# Altium PCB som_fpga.PcbDoc (part 2 of 2)
Units mil, origin at the board's own origin, x right, y up, seen from the top; angles counter-clockwise.
Board outline 2362.2 x 1968.5 mil, 4 copper layers (F.Cu, In1.Cu, In2.Cu, B.Cu); 88 components, 289 nets, 794 pads, 250 vias.
Unrouted connection lines stored in the file: 96.
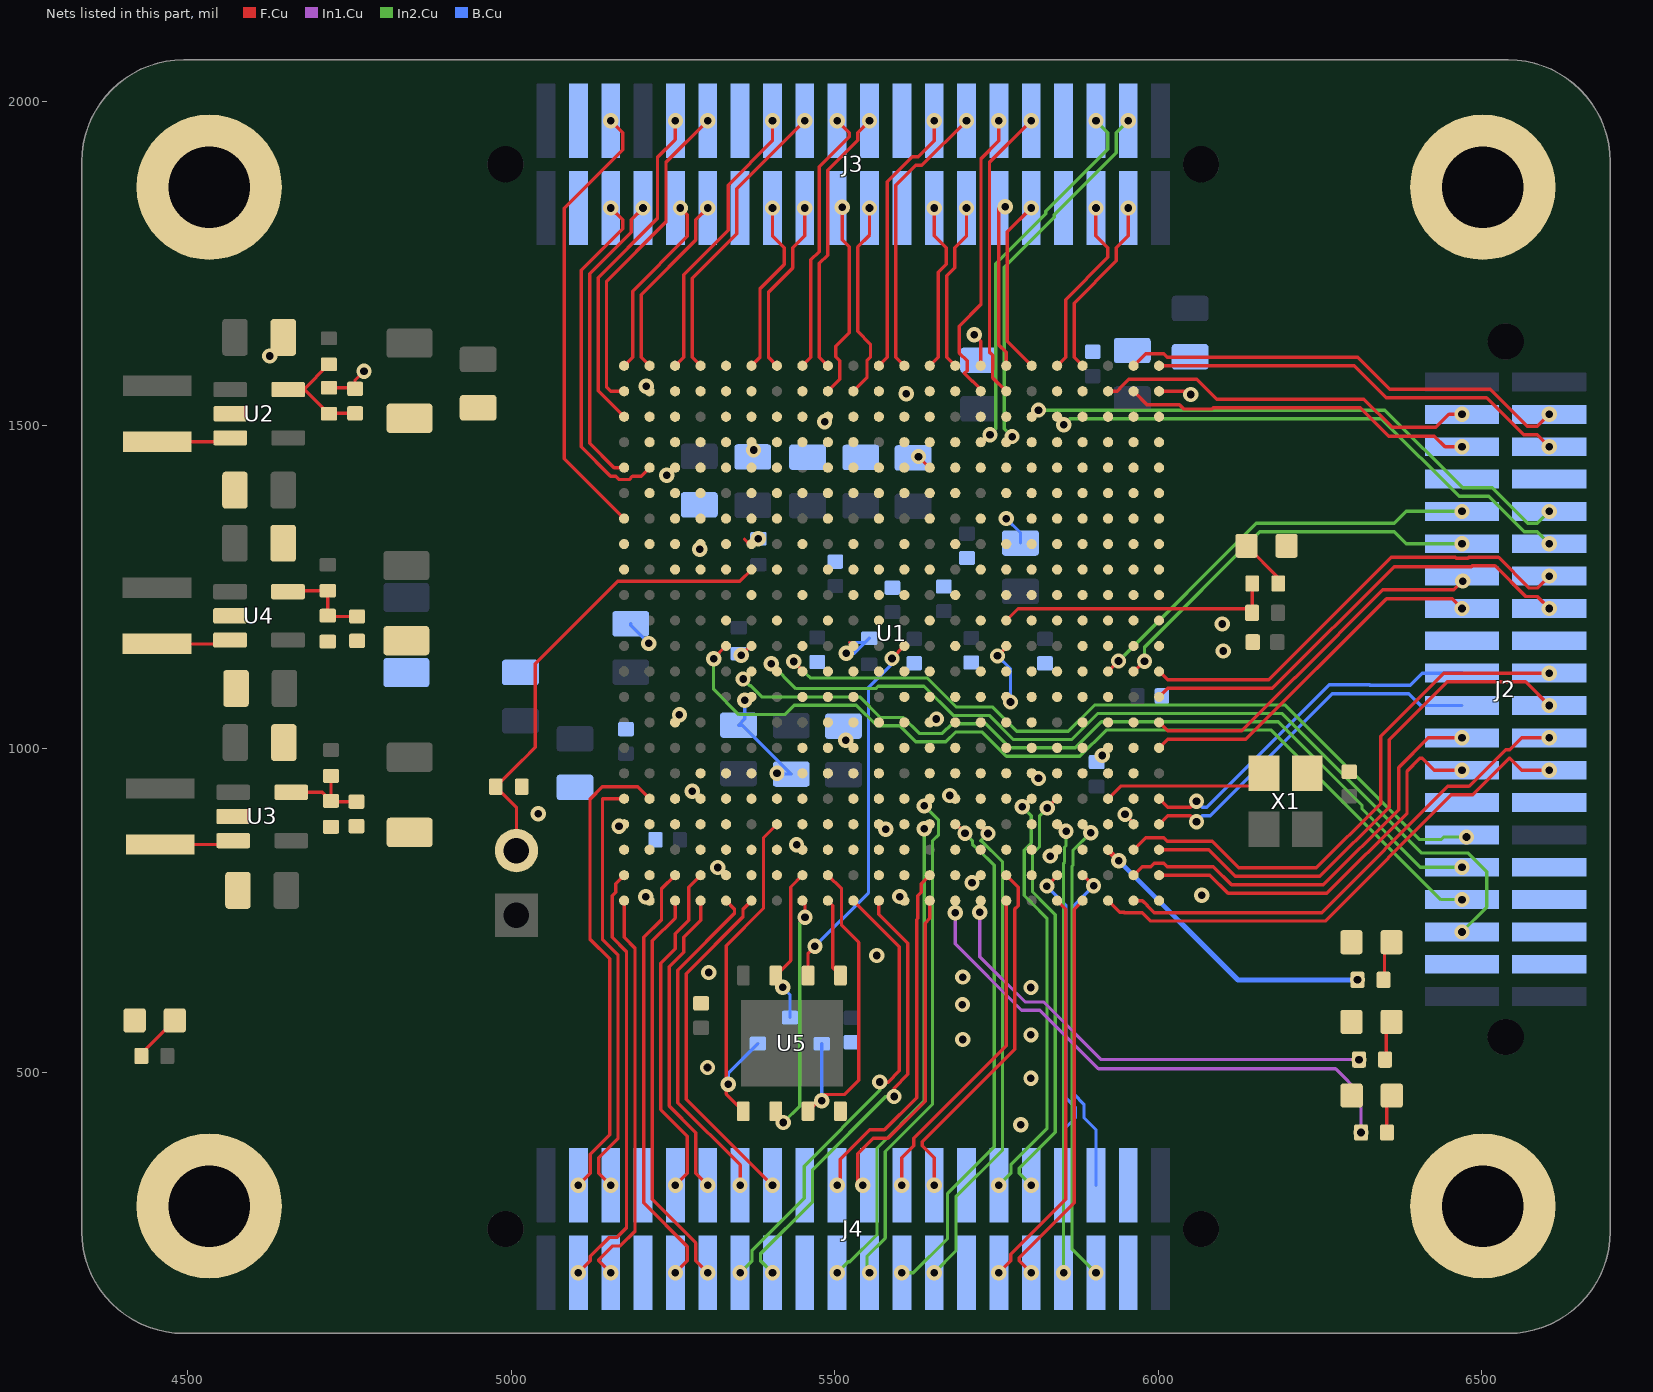
[diagram p4: the nets of this part, all layers, seen from the top]

## Via types
v1: diameter 23.62, hole 11.81, F.Cu to B.Cu, tented both sides, 250 vias

## Nets (pads, with @x,y where several pads share a name; then routed paths per layer and width w, separated by ;. In a path a pad name is that pad's centre, name@x,y a point inside that pad or via, vN(x,y) a via of type N, cw(c..) or ccw(c..) an arc to the next point about the centre after c; other vN are vias at no path point) (continued)
CONN1.1_P: J3.5 U1.AB7 | length 698.7
  F.Cu w5.25: v1(5153.64,1970.67) 5172.08,1952.23 5172.08,1925.85 5081.63,1835.4 5081.63,1448.29 U1.AB7@5174.41,1355.51
CONN1.2_N: J3.8 U1.AB5 | length 466.9
  F.Cu w5.25: U1.AB5@5174.41,1434.25 5158.74,1434.25 5120.98,1472.01 5120.98,1733.75 5185.2,1797.97 5185.2,1817.19 v1(5203.64,1835.63)
CONN1.2_P: J3.6 U1.AA5 | length 537.8
  F.Cu w5.25: v1(5153.64,1835.63) 5172.08,1817.19 5172.08,1803.41 5107.86,1739.18 5107.86,1466.57 5153.3,1421.13 5161.55,1421.13 5166.8,1415.88 5182.02,1415.88 5187.27,1421.13 5200.66,1421.13 U1.AA5@5213.78,1434.25
CONN1.3_N: J3.11 U1.AB2 | length 506.6
  F.Cu w5.25: U1.AB2@5174.41,1552.36 5153.6,1552.36 5147.21,1558.75 5147.21,1722.57 5239.08,1814.44 5239.08,1906.1 v1(5303.64,1970.67)
CONN1.3_P: J3.9 U1.AB3 | length 523.9
  F.Cu w5.25: U1.AB3@5174.41,1512.99 5134.08,1553.32 5134.08,1728.01 5225.95,1819.88 5225.95,1913.75 5253.64,1941.44 v1(5253.64,1970.67)
CONN1.4_N: J3.10 U1.AB1 | length 288.8
  F.Cu w5.25: U1.AB1@5174.41,1591.73 5187.53,1604.86 5187.53,1707.05 5272.08,1791.6 5272.08,1824.92 v1(5261.37,1835.63)
CONN1.4_P: J3.12 U1.AA1 | length 292
  F.Cu w5.25: U1.AA1@5213.78,1591.73 5200.66,1604.86 5200.66,1701.61 5285.2,1786.16 5285.2,1817.19 v1(5303.64,1835.63)
CONN1.5_N: J3.15 U1.Y1 | length 441.3
  F.Cu w5.25: U1.Y1@5253.15,1591.73 5266.27,1604.86 5266.27,1732.25 5335.17,1801.14 5335.17,1870.76 5403.64,1939.23 v1(5403.64,1970.67)
CONN1.5_P: J3.17 U1.W1 | length 456.5
  F.Cu w5.25: U1.W1@5292.52,1591.73 5279.4,1604.86 5279.4,1726.81 5348.29,1795.71 5348.29,1865.32 v1(5453.64,1970.67)
CONN1.6_N: J3.16 U1.U1 | length 272.6
  F.Cu w5.25: U1.U1@5371.26,1591.73 5384.38,1604.86 5384.38,1710.59 5422.08,1748.29 5422.08,1774.28 5403.64,1792.72 v1(5403.64,1835.63)
CONN1.6_P: J3.18 U1.T1 | length 272.6
  F.Cu w5.25: U1.T1@5410.63,1591.73 5397.51,1604.86 5397.51,1705.16 5435.2,1742.85 5435.2,1774.28 5453.64,1792.72 v1(5453.64,1835.63)
CONN1.7_N: J3.21 U1.P1 | length 416.6
  F.Cu w5.25: U1.P1@5489.37,1591.73 5476.25,1604.86 5476.25,1750.04 5488.85,1762.64 5488.85,1820.72 5489.07,1820.95 5489.07,1850.31 5488.85,1850.54 5488.85,1894.13 5535.2,1940.49 5535.2,1952.23 v1(5553.64,1970.67)
CONN1.7_P: J3.19 U1.R1 | length 416.6
  F.Cu w5.25: U1.R1@5450,1591.73 5463.12,1604.86 5463.12,1755.47 5475.72,1768.07 5475.72,1826.16 5475.95,1826.39 5475.95,1844.87 5475.72,1845.1 5475.72,1899.57 5522.08,1945.93 5522.08,1952.23 v1(5503.64,1970.67)
CONN1.8_N: J3.22 U1.N2 | length 310.1
  F.Cu w5.25: U1.N2@5528.74,1552.36 5549.74,1573.36 5549.74,1599.34 5555.12,1604.72 5555.12,1625.2 5535.2,1645.11 5535.2,1775.36 5553.64,1793.8 v1(5553.64,1835.63)
CONN1.8_P: J3.20 U1.P2 | length 307.8
  F.Cu w5.25: U1.P2@5489.37,1552.36 5507.74,1570.74 5507.74,1599.34 5501.18,1605.9 5501.18,1622.05 5522.08,1642.95 5522.08,1775.95 5511.37,1786.67 v1(5511.37,1836.77)
CONN1.9_N: J3.27 U1.L1 | length 435.2
  F.Cu w5.25: U1.L1@5607.48,1591.73 5594.36,1604.86 5594.36,1870.9 5625.16,1901.71 5634.68,1901.71 v1(5703.64,1970.67)
CONN1.9_P: J3.25 U1.M1 | length 419.9
  F.Cu w5.25: U1.M1@5568.11,1591.73 5581.23,1604.86 5581.23,1876.34 5619.72,1914.83 5629.24,1914.83 5653.64,1939.23 v1(5653.64,1970.67)
CONN1.10_N: J3.28 U1.J1 | length 262
  F.Cu w5.25: U1.J1@5686.22,1591.73 5673.1,1604.86 5673.1,1731.14 5685.2,1743.25 5685.2,1774.28 5703.64,1792.72 v1(5703.64,1835.63)
CONN1.10_P: J3.26 U1.K1 | length 262
  F.Cu w5.25: U1.K1@5646.85,1591.73 5659.97,1604.86 5659.97,1736.58 5672.08,1748.68 5672.08,1774.28 5653.64,1792.72 v1(5653.64,1835.63)
CONN1.11_N: J3.31 U1.G2 | length 456
  F.Cu w5.25: U1.G2@5764.96,1552.36 5743.7,1573.62 5743.7,1586.22 5743.96,1586.48 5743.96,1607.82 5739.11,1612.67 5739.11,1906.14 v1(5803.64,1970.67)
CONN1.11_P: J3.29 U1.H2 | length 461.3
  F.Cu w5.25: U1.H2@5725.59,1552.36 5725.59,1555.51 5713.39,1567.72 5712.6,1567.72 5700.39,1579.92 5704.59,1584.12 5704.59,1599.34 5692.52,1611.42 5692.52,1653.15 5725.98,1686.61 5725.98,1911.57 5753.64,1939.23 v1(5753.64,1970.67)
CONN1.12_N: J3.32 U1.F1 | length 274.7
  F.Cu w5.25: v1(5803.64,1835.63) 5766.77,1798.75 5766.77,1629.3 U1.F1@5804.33,1591.73
CONN1.12_P: J3.30 U1.G1 | length 248.6
  F.Cu w5.25: v1@5753.64,1835.63 5753.64,1623.86 5764.96,1612.54 U1.G1@5764.96,1591.73
  other v1: 5763.39,1837.4
CONN1.13_N: J3.37 U1.G4 | length 585.3
  F.Cu w5.25: U1.G4@5764.96,1473.62 5765.35,1473.62 v1(5774.02,1482.28)
  In2.Cu w5.25: v1(5774.02,1482.28) 5762.11,1494.18 5762.11,1743.99 5839.07,1820.95 5839.07,1825.07 5935.2,1921.2 5935.2,1952.23 v1(5953.64,1970.67)
CONN1.13_P: J3.35 U1.H4 | length 587.7
  F.Cu w5.25: U1.H4@5725.59,1473.62 5728.43,1473.62 v1(5739.94,1485.14)
  In2.Cu w5.25: v1(5739.94,1485.14) 5748.99,1494.18 5748.99,1749.43 5825.95,1826.39 5825.95,1830.51 5922.08,1926.64 5922.08,1952.23 v1(5903.64,1970.67)
CONN1.14_N: J3.38 U1.D1 | length 284
  F.Cu w5.25: U1.D1@5883.07,1591.73 5869.95,1604.86 5869.95,1688.62 5935.2,1753.88 5935.2,1774.28 5953.64,1792.72 v1(5953.64,1835.63)
CONN1.14_P: J3.36 U1.E1 | length 284
  F.Cu w5.25: U1.E1@5843.7,1591.73 5856.82,1604.86 5856.82,1694.06 5922.08,1759.31 5922.08,1774.28 5903.64,1792.72 v1(5903.64,1835.63)
CONN2.1_N: J4.5 U1.D19 | length 725.8
  F.Cu w5: U1.D19@5883.07,883.07 5883.07,882.68 v1(5895.67,870.08)
  In2.Cu w5: v1(5895.67,870.08) 5868.13,842.54 5868.13,819.34 5866.52,817.72 5866.52,227.09 v1(5903.64,189.96)
CONN2.1_P: J4.7 U1.E19 | length 702.3
  F.Cu w5: U1.E19@5843.7,883.07 5846.85,883.07 v1(5857.48,872.44)
  In2.Cu w5: v1(5853.64,189.96) 5853.64,823.05 5855.26,824.67 5855.26,847.87 5857.48,850.1 v1(5857.48,872.44)
CONN2.2_N: J4.6 U1.D21 | length 513.1
  F.Cu w5: U1.D21@5883.07,804.33 5883.86,804.33 v1(5900,788.19)
  B.Cu w5: v1(5900,788.19) 5870.03,758.22 5870.03,465.45 5885.08,450.4 5885.08,429.78 5903.64,411.22 J4.6@5903.64,325
CONN2.2_P: J4.8 U1.E21 | length 511.9
  F.Cu w5: v1(5827.88,787.5) 5843.7,803.32 U1.E21@5843.7,804.33
  B.Cu w5: v1(5827.88,787.5) 5857.16,758.22 5857.16,460.11 5872.2,445.07 5872.2,429.78 5853.64,411.22 J4.8@5853.64,325
CONN2.3_N: J4.9 U1.D22 | length 623.2
  F.Cu w5.25: v1(5803.64,189.96) 5785.2,208.4 5785.2,213.33 5869.95,298.07 5869.95,751.84 U1.D22@5883.07,764.96
CONN2.3_P: J4.11 U1.E22 | length 623.2
  F.Cu w5.25: v1(5753.64,189.96) 5772.08,208.4 5772.08,218.76 5856.82,303.51 5856.82,751.84 U1.E22@5843.7,764.96
CONN2.4_N: J4.10 U1.E18 | length 659.1
  F.Cu w5: v1(5828.35,908.27) 5842.52,922.44 U1.E18@5843.7,922.44
  In2.Cu w5: v1(5803.64,325) 5785.08,343.56 5785.08,351.57 5840.69,407.18 5840.69,743.22 5816.48,767.43 5816.48,767.53 5805.7,778.31 5805.7,837.86 5816.48,848.64 5816.48,896.4 v1(5828.35,908.27)
CONN2.4_P: J4.12 U1.F18 | length 660.3
  F.Cu w5: v1(5789.76,910.24) 5801.97,922.44 U1.F18@5804.33,922.44
  In2.Cu w5: v1(5753.64,325) 5772.2,343.56 5772.2,356.9 5827.81,412.51 5827.81,737.88 5803.6,762.1 5803.6,762.2 5792.82,772.98 5792.82,843.19 5803.6,853.97 5803.6,896.4 v1(5789.76,910.24)
CONN2.5_N: J4.15 U1.H19 | length 760.5
  F.Cu w5: U1.H19@5725.59,883.07 5725.59,880.07 v1(5736.82,868.85)
  In2.Cu w5: v1(5653.64,189.96) 5687.15,223.46 5687.15,307.18 5759.19,379.22 5759.19,825.06 5726.56,857.69 5725.66,857.69 v1(5736.82,868.85)
CONN2.5_P: J4.17 U1.J19 | length 788.8
  F.Cu w5: U1.J19@5686.22,883.07 5687.4,883.07 v1(5701.18,869.29)
  In2.Cu w5: v1(5603.64,189.96) 5621.46,189.96 5674.27,242.78 5674.27,312.51 5746.32,384.56 5746.32,819.73 5721.23,844.81 5720.33,844.81 5712.78,852.36 5712.78,857.69 v1(5701.18,869.29)
CONN2.6_N: J4.18 U1.G22 | length 506.8
  F.Cu w5.25: v1(5603.64,325) 5603.64,367.91 5622.08,386.35 5622.08,397.9 5764.96,540.78 U1.G22@5764.96,764.96
CONN2.6_P: J4.16 U1.G21 | length 555.9
  F.Cu w5.25: v1(5653.64,325) 5653.64,367.91 5635.2,386.35 5635.2,392.46 5778.08,535.34 5778.08,752.1 5783.33,757.35 5783.33,785.96 U1.G21@5764.96,804.33
CONN2.7_N: J4.21 U1.K19 | length 755
  F.Cu w5: v1(5638.19,875.98) 5645.28,883.07 U1.K19@5646.85,883.07
  In2.Cu w5: v1(5503.64,189.96) 5520.6,206.91 5523.4,206.91 5565.22,248.73 5565.22,382.59 5638.19,455.56 v1(5638.19,875.98)
CONN2.7_P: J4.19 U1.K18 | length 792.8
  F.Cu w5: v1(5638.19,911.42) 5646.85,920.08 U1.K18@5646.85,922.44
  In2.Cu w5: v1(5553.64,189.96) 5549.63,193.97 5549.63,214.94 5578.09,243.4 5578.09,377.25 5651.06,450.23 5651.06,857.48 5660.37,866.79 5660.37,889.23 v1(5638.19,911.42)
CONN2.8_N: J4.20 U1.K22 | length 502.8
  F.Cu w5.25: v1(5543.05,325) 5535.3,332.75 5535.3,373.66 5559.41,397.77 5582.25,397.77 5639.63,455.16 5639.63,730.35 5646.85,737.57 U1.K22@5646.85,764.96
CONN2.8_P: J4.22 U1.K21 | length 552
  F.Cu w5.25: v1(5503.64,325) 5508.66,330.02 5508.66,365.58 5553.97,410.89 5576.81,410.89 5626.51,460.59 5626.51,735.79 5628.48,737.76 5628.48,772.57 5633.73,777.82 5633.73,791.21 U1.K21@5646.85,804.33
CONN2.9_N: J4.25 U1.M22 | length 703.1
  F.Cu w5.25: U1.M22@5568.11,764.96 5568.11,744.15 5612.86,699.4 5612.86,496.51 5591.65,475.3 v1(5591.65,462.3)
  In2.Cu w5.25: v1(5403.64,189.96) 5385.2,208.4 5385.2,219.23 5465.62,299.64 5465.62,349.27 5578.66,462.3 v1(5591.65,462.3)
CONN2.9_P: J4.27 U1.N22 | length 714
  F.Cu w5.25: U1.N22@5528.74,764.96 5599.74,693.96 5599.74,501.95 5582.37,484.58 v1(5569.38,484.58)
  In2.Cu w5.25: v1(5353.64,189.96) 5372.08,208.4 5372.08,224.67 5452.49,305.08 5452.49,354.7 5569.38,471.58 v1(5569.38,484.58)
CONN2.10_N: J4.28 U1.V22 | length 521.8
  F.Cu w5.25: U1.V22@5331.89,764.96 5345.01,751.84 5345.01,745.22 5257.48,657.69 5257.48,566.65 5257.09,566.25 5257.09,536.9 5257.48,536.5 5257.48,452.6 5353.64,356.44 v1(5353.64,325)
CONN2.10_P: J4.26 U1.U22 | length 537.1
  F.Cu w5.25: U1.U22@5371.26,764.96 5358.14,751.84 5358.14,739.78 5270.6,652.25 5270.6,561.21 5270.21,560.82 5270.21,542.33 5270.6,541.94 5270.6,458.04 v1(5403.64,325)
CONN2.11_N: J4.29 U1.Y22 | length 625.3
  F.Cu w5.25: U1.Y22@5253.15,764.96 5253.15,738.13 5217.73,702.72 5217.73,303.36 5285.2,235.89 5285.2,208.4 v1(5303.64,189.96)
CONN2.11_P: J4.31 U1.Y21 | length 670.1
  F.Cu w5.25: U1.Y21@5253.15,804.33 5232.15,783.33 5232.15,735.7 5204.61,708.15 5204.61,297.92 5272.08,230.45 5272.08,208.4 v1(5253.64,189.96)
CONN2.12_N: J4.30 U1.W22 | length 484.8
  F.Cu w5.25: U1.W22@5292.52,764.96 5292.52,734.59 5266.56,708.63 5266.56,685.33 5243.96,662.73 5243.96,447.56 5285.2,406.32 5285.2,343.44 v1(5303.64,325)
CONN2.12_P: J4.32 U1.W21 | length 529.6
  F.Cu w5.25: v1(5253.64,325) 5272.08,343.44 5272.08,400.88 5230.84,442.12 5230.84,668.16 5253.15,690.48 5253.15,713.78 5274.15,734.78 5274.15,785.96 U1.W21@5292.52,804.33
CONN2.13_N: J4.35 U1.AB22 | length 619.7
  F.Cu w5.25: v1(5153.64,189.96) 5135.2,208.4 5135.2,209.78 5156.66,231.23 5168.47,231.23 5191.21,253.97 5191.21,691.64 5174.41,708.44 U1.AB22@5174.41,764.96
CONN2.13_P: J4.37 U1.AB21 | length 669
  F.Cu w5.25: v1(5103.64,189.96) 5122.08,208.4 5122.08,215.22 5151.22,244.36 5163.03,244.36 5178.08,259.41 5178.08,686.2 5155.91,708.38 5155.91,731.5 5156.04,731.63 5156.04,772.57 5161.29,777.82 5161.29,791.21 U1.AB21@5174.41,804.33
CONN2.14_N: J4.36 U1.AB18 | length 660.8
  F.Cu w5.25: v1(5153.64,325) 5135.2,343.44 5135.2,367.66 5164.98,397.43 5164.98,680.75 5141,704.72 5141,922.44 U1.AB18@5174.41,922.44
CONN2.14_P: J4.38 U1.AA18 | length 736.8
  F.Cu w5.25: v1(5103.64,325) 5122.08,343.44 5122.08,373.09 5151.86,402.87 5151.86,675.31 5121.65,705.51 5121.65,921.65 5140.81,940.81 5195.41,940.81 U1.AA18@5213.78,922.44
CONN3.5_N: J2.15 U1.A21 | length 612.3
  F.Cu w5.25: U1.A21@6001.18,804.33 6079.7,804.33 6107.76,776.26 6260.69,776.26 6384.51,900.09 6384.51,965.39 6404.19,985.07 6408.14,985.07 6426.57,966.63 v1(6469.49,966.63)
CONN3.5_P: J2.17 U1.B21 | length 661.5
  F.Cu w5.25: U1.B21@5961.81,804.33 5974.94,817.45 5988.32,817.45 5993.57,822.7 6008.79,822.7 6014.04,817.45 6085.13,817.45 6113.2,789.39 6255.25,789.39 6371.39,905.53 6371.39,970.83 6417.2,1016.63 v1(6469.49,1016.63)
CONN3.6_N: J2.18 U1.B22 | length 762.4
  F.Cu w5.25: U1.B22@5961.81,764.96 5975.59,764.96 5982.81,757.74 5982.81,757.35 5993.57,746.59 6252.44,746.59 6447.45,941.6 6480.35,941.6 6536.95,998.2 6543.18,998.2 6561.61,1016.63 v1(6604.53,1016.63)
CONN3.6_P: J2.16 U1.C22 | length 807
  F.Cu w5.25: U1.C22@5922.44,764.96 5940.55,746.85 5947.24,746.85 5947.51,746.59 5975.01,746.59 5988.13,733.46 6257.87,733.46 6452.89,928.48 6485.79,928.48 6542.38,985.07 6543.18,985.07 6561.61,966.63 v1(6604.53,966.63)
CONN3.7_N: J2.19 U1.A19 | length 567.2
  F.Cu w5.25: U1.A19@6001.18,883.07 6014.3,896.19 6049.87,896.19 v1(6059.06,887.01)
  B.Cu w5.25: v1(6059.06,887.01) 6068.24,896.19 6080.28,896.19 6269.16,1085.07 6387.37,1085.07 6405.81,1066.63 J2.19@6469.49,1066.63
CONN3.7_P: J2.21 U1.A18 | length 567.4
  F.Cu w5.25: U1.A18@6001.18,922.44 6014.3,909.32 6049.87,909.32 v1(6059.06,918.5)
  B.Cu w5.25: v1(6059.06,918.5) 6068.24,909.32 6074.84,909.32 6263.95,1098.43 6326.77,1098.43 6327,1098.2 6389.53,1098.2 6407.97,1116.63 J2.21@6469.49,1116.63
CONN3.8_N: J2.20 U1.A20 | length 821.4
  F.Cu w5.25: U1.A20@6001.18,843.7 6077.73,843.7 6118.94,802.49 6249.79,802.49 6356.96,909.66 6356.96,1013.82 6446.65,1103.51 6567.65,1103.51 v1(6604.53,1066.63)
CONN3.8_P: J2.22 U1.B20 | length 855.4
  F.Cu w5.25: U1.B20@5961.81,843.7 5980.31,862.2 5981.5,862.2 5981.63,862.07 6008.79,862.07 6014.04,856.82 6083.16,856.82 6124.37,815.62 6244.36,815.62 6343.83,915.09 6343.83,1019.25 6441.21,1116.63 v1(6604.53,1116.63)
CONN3.9_N: J2.25 U1.A16 | length 570.2
  F.Cu w5.25: U1.A16@6001.18,1001.18 6014.3,1014.3 6135.17,1014.3 6352.76,1231.89 6454.23,1231.89 v1(6469.49,1216.63)
CONN3.9_P: J2.27 U1.A15 | length 574.9
  F.Cu w5.25: U1.A15@6001.18,1040.55 6014.3,1027.43 6129.2,1027.43 6211.09,1109.32 6211.54,1109.32 ; 6214.3,1112.08 6211.54,1109.32 ; v1(6470.63,1258.91) 6457,1245.28 6347.05,1245.28 6211.54,1109.77 6211.54,1109.32
CONN3.10_N: J2.26 U1.A14 | length 714.5
  F.Cu w5.25: U1.A14@6001.18,1079.92 6014.3,1093.04 6176.26,1093.04 6364.41,1281.2 6484.17,1281.2 6485.38,1282.41 6520.51,1282.41 6567.85,1235.07 6586.09,1235.07 v1(6604.53,1216.63)
CONN3.10_P: J2.28 U1.A13 | length 715.5
  F.Cu w5.25: U1.A13@6001.18,1119.29 6014.3,1106.17 6170.82,1106.17 6360.19,1295.54 6459.03,1295.54 6460.25,1294.32 6478.73,1294.32 6479.94,1295.54 6525.95,1295.54 6573.29,1248.2 6586.09,1248.2 v1(6604.53,1266.63)
CONN3.11_N: J2.29 U1.B13 | length 617.5
  F.Cu w5.25: U1.B13@5961.81,1119.29 5962.8,1119.29 v1(5978.68,1135.17)
  In2.Cu w5.25: v1(5978.68,1135.17) 5978.68,1156.97 6156.78,1335.07 6364.83,1335.07 6383.27,1316.63 v1(6469.49,1316.63)
CONN3.11_P: J2.31 U1.C13 | length 649.5
  F.Cu w5.25: U1.C13@5922.44,1119.29 v1(5938.58,1135.43)
  In2.Cu w5.25: v1(5938.58,1135.43) 6151.35,1348.2 6364.83,1348.2 6383.27,1366.63 v1(6469.49,1366.63)
CONN3.12_N: J2.30 U1.E3 | length 851
  F.Cu w5.25: U1.E3@5843.7,1512.99 5843.7,1511.02 v1(5853.94,1500.79)
  In2.Cu w5.25: v1(5853.94,1500.79) 5863.25,1510.1 6344.79,1510.1 6465,1389.89 6510.67,1389.89 6565.49,1335.07 6586.09,1335.07 v1(6604.53,1316.63)
CONN3.12_P: J2.32 U1.F3 | length 884.6
  F.Cu w5.25: U1.F3@5804.33,1512.99 5804.72,1512.99 v1(5814.96,1523.23)
  In2.Cu w5.25: v1(5814.96,1523.23) 6350.23,1523.23 6470.43,1403.02 6516.1,1403.02 6570.93,1348.2 6586.09,1348.2 v1(6604.53,1366.63)
CONN3.13_N: J2.35 U1.B2 | length 545.1
  F.Cu w5.25: U1.B2@5961.81,1552.36 5983.07,1531.1 5984.65,1531.1 5984.91,1531.37 6032.81,1531.37 6039.24,1524.93 6082.62,1524.93 6084.72,1527.03 6312.51,1527.03 6356.47,1483.07 6426.77,1483.07 6443.21,1466.63 v1(6469.49,1466.63)
CONN3.13_P: J2.37 U1.C2 | length 594.2
  F.Cu w5.25: U1.C2@5922.44,1552.36 5936.61,1552.36 5940.16,1555.91 5940.16,1556.69 5954.2,1570.74 6059.58,1570.74 6090.16,1540.16 6317.94,1540.16 6361.64,1496.46 6429.13,1496.46 6449.31,1516.63 v1(6469.49,1516.63)
CONN3.14_N: J2.36 U1.A1 | length 655.2
  F.Cu w5.25: U1.A1@6001.18,1591.73 6302.92,1591.73 6352.27,1542.39 6507.39,1542.39 6564.7,1485.07 6586.09,1485.07 v1(6604.53,1466.63)
CONN3.14_P: J2.38 U1.B1 | length 704.4
  F.Cu w5.25: U1.B1@5961.81,1591.73 5980.31,1610.24 5985.43,1610.24 5985.56,1610.11 6008.79,1610.11 6014.04,1604.86 6308.36,1604.86 6357.71,1555.51 6512.82,1555.51 6570.14,1498.2 6586.09,1498.2 v1(6604.53,1516.63)
FLASH_CS: R15.2 U1.T19 U5.1 | length 582.2
  F.Cu w5: U5.1@5358.66,439.57 5332.28,465.94 5332.28,695.55 5389.76,753.03 5389.76,862.2 U1.T19@5410.63,883.07
  B.Cu w5: v1(5335.26,481.1) 5335.26,498.25 R15.2@5381.1,544.09 R15.2@5371.65,534.65
FLASH_D0: U1.P22 U5.5 | length 123.7
  F.Cu w5: U1.P22@5489.37,764.96 5496.85,757.48 5496.85,661.02 U5.5@5508.66,649.21
FLASH_D1: U1.R22 U5.2 | length 380.8
  F.Cu w5: U5.2@5408.66,439.57 5408.66,433.86 v1(5420.47,422.05) ; U1.R22@5450,764.96 5453.92,761.04 v1(5453.92,739.37)
  In2.Cu w5: v1(5420.47,422.05) 5445.67,447.24 5445.67,731.12 v1(5453.92,739.37)
FLASH_D2: R16.2 U1.P21 U5.3 | length 522.9
  F.Cu w5: U5.3@5458.66,439.57 5484.29,465.2 5514.8,465.2 5537.01,487.4 5537.01,700.39 5510.49,726.91 5510.49,783.21 U1.P21@5489.37,804.33
  B.Cu w5: v1(5479.85,455.7) 5479.92,455.77 R16.2@5479.92,543.7
FLASH_D3: R17.2 U1.R21 U5.7 | length 246.3
  F.Cu w5: v1(5419.69,630.98) 5419.69,638.19 U5.7@5408.66,649.21 5431.75,672.3 5431.75,786.08 U1.R21@5450,804.33
  B.Cu w5: v1(5419.69,630.98) 5430.71,619.96 R17.2@5430.71,584.25
FLASH_SCLK: U1.L12 U5.6 | length 571.1
  F.Cu w5: U5.6@5458.66,649.21 5458.66,683.86 v1(5469.29,694.49) ; v1(5588.53,1139.27) 5588.53,1139.71 U1.L12@5607.48,1158.66
  B.Cu w5: v1(5469.29,694.49) 5552.3,777.5 5552.3,1094.68 5588.53,1130.91 v1(5588.53,1139.27)
GND: C1.2 C2.2 C3.2 C4.2 C5.2 C6.2 C7.2 C8.2 C9.2 C10.2 C11.2 C12.2 C13.2 C14.2 C15.2 C16.2 C17.2 C18.2 C19.2 C20.2 C21.2 C22.2 C23.2 C24.2 C25.2 C26.2 C27.2 C28.2 C29.2 C30.2 C31.2 C32.2 C33.2 C34.2 C35.2 C36.2 C37.2 C38.2 C39.2 C40.2 C41.2 C42.2 C43.2 C44.2 C45.2 C46.2 D1.1 D2.1 D3.1 D4.1 D5.1 H1.1 H2.1 H3.1 H4.1 J2.3 J2.4 J2.6 J2.8 J2.10 J2.13 J2.14 J2.23 J2.24 J2.33 J2.34 J3.3 J3.4 J3.13 J3.14 J3.23 J3.24 J3.33 J3.34 J4.3 J4.4 J4.13 J4.14 J4.23 J4.24 J4.33 J4.34 R2.2 R3.2 R6.2 R8.2 U1.A2 U1.A3 U1.A5 U1.A7 U1.A8 U1.A9 U1.A10 U1.A11 U1.A12 U1.A22 U1.AA2 U1.AA12 U1.AA22 U1.AB9 U1.AB19 U1.B3 U1.B5 U1.B7 U1.B8 U1.B9 U1.B10 U1.B11 U1.B12 U1.B19 U1.C3 U1.C4 U1.C6 U1.C8 U1.C9 U1.C10 U1.C11 U1.C12 U1.C16 U1.D3 U1.D4 U1.D6 U1.D8 U1.D9 U1.D10 U1.D11 U1.D12 U1.D13 U1.E4 U1.E5 U1.E7 U1.E8 U1.E9 U1.E11 U1.E20 U1.F5 U1.F7 U1.F9 U1.F11 U1.F17 U1.G5 U1.G6 U1.G7 U1.G8 U1.G9 U1.G10 U1.G12 U1.G14 U1.H1 U1.H7 U1.H9 U1.H11 U1.H21 U1.J8 U1.J10 U1.J12 U1.J18 U1.K5 U1.K7 U1.K9 U1.K11 U1.K15 U1.L2 U1.L8 U1.L9 U1.L10 U1.L22 U1.M7 U1.M9 U1.M10 U1.M11 U1.M19 U1.N6 U1.N8 U1.N9 U1.N10 U1.N16 U1.P3 U1.P7 U1.P9 U1.P11 U1.P13 U1.R8 U1.R10 U1.R12 U1.R20 U1.T7 U1.T9 U1.T11 U1.T17 U1.U4 U1.U10 U1.U14 U1.V1 U1.V11 U1.V21 U1.W8 U1.W18 U1.Y5 U1.Y15 U2.2 U3.2 U4.2 U5.4 X1.2 | length 771.8
  F.Cu w5: v1(4626.54,1606.73) 4647.7,1627.89 C2.2@4647.7,1635.67 ; R2.2@4718.07,1557.72 4756.85,1557.72 C44.2@4758.43,1556.14 4758.43,1569.33 v1(4772.2,1583.11) ; v1(5166.54,879.92) 5169.69,883.07 U1.AB19@5174.41,883.07 ; v1(5207.87,770.87) U1.AA22@5213.78,764.96 ; v1(5212.6,1162.6) 5213.78,1161.42 U1.AA12@5213.78,1158.66 ; v1(5360.95,1074.79) 5366.08,1079.92 U1.U14@5371.26,1079.92 ; U1.U4@5371.26,1473.62 5371.26,1464.85 v1(5374.52,1461.6) ; v1(5484.25,1505.12) 5489.37,1510.24 U1.P3@5489.37,1512.99 ; v1(5517.13,1012.8) U1.N16@5528.74,1001.18 ; v1(5600.39,771.26) 5606.69,764.96 U1.L22@5607.48,764.96 ; U1.L2@5607.48,1552.36 5607.48,1551.18 v1(5610.24,1548.43) ; v1(5629.31,1451.36) 5646.42,1434.25 U1.K5@5646.85,1434.25 ; U1.K15@5646.85,1040.55 5651.97,1040.55 v1(5657.09,1045.67) ; v1(5677.56,927.56) 5682.68,922.44 U1.J18@5686.22,922.44 ; v1(5712.03,792.52) 5723.84,804.33 U1.H21@5725.59,804.33 ; v1(5715.35,1639.76) 5725.59,1629.53 U1.H1@5725.59,1591.73 ; v1(5751.41,1143.27) 5764.96,1156.82 U1.G12@5764.96,1158.66 ; U1.F17@5804.33,961.81 5807.09,961.81 v1(5814.96,953.94) ; v1(5948.54,898.31) 5961.81,885.04 U1.B19@5961.81,883.07 ; U1.A2@6001.18,1552.36 6044.88,1552.36 v1(6050,1547.24)
  B.Cu w5: C8.2@5184.65,1192.91 5184.65,1190.55 v1(5212.6,1162.6) ; v1(5360.95,1074.79) 5360.95,1045.99 C12.2@5351.18,1036.22 5357.09,1036.22 C7.2@5432.68,960.63 5411.81,960.63 v1(5410.63,961.81) ; v1(5751.41,1143.27) 5771.65,1123.02 v1(5771.65,1072.05) ; v1(5764.96,1355.51) 5787.01,1333.46 C26.2@5787.01,1317.72
  other v1: 5787.4,418.5 5803.15,490.55 5303.15,507.09 5697.64,550.39 5803.15,557.48 5697.24,604.33 5803.15,630.71 5697.64,646.85 5305.12,653.94 5564.96,680.32 6067.32,773.23 5318.9,816.14 5833.07,833.86 5440.94,851.57 5578.74,875.2 5041.73,899.21 5279.53,934.25 5913.39,989.37 5259.84,1052.36 6100.39,1150.79 6098.82,1192.52 5291.34,1308.27 5240.16,1422.44 5208.66,1560.24
JTAG_TCK: J2.7 U1.V12 | length 1424.2
  F.Cu w5: v1(5312.72,1139.06) 5312.72,1139.49 U1.V12@5331.89,1158.66
  In2.Cu w5: v1(5312.72,1139.06) 5312.72,1091.65 5351.76,1052.61 5422.57,1052.61 5437.01,1067.05 5533.37,1067.05 5565.2,1035.22 5600.63,1035.22 5625.24,1010.61 5671.61,1010.61 5686.55,1025.55 5728.1,1025.55 5765.34,988.31 5878.86,988.31 5919.25,1028.7 6174.75,1028.7 6436.81,766.63 v1(6469.49,766.63)
JTAG_TDI: J2.11 U1.R13 | length 1213.4
  F.Cu w5: v1(5436.73,1134.53) 5450,1121.26 U1.R13@5450,1119.29
  In2.Cu w5: v1(5436.73,1134.53) 5459.84,1111.42 5460.63,1111.42 5462.97,1109.07 5643.26,1109.07 5688.16,1064.17 5744.09,1064.17 5781.34,1026.93 5861.06,1026.93 5901.45,1067.32 6196.16,1067.32 6404.03,859.45 6437.01,859.45 6440.94,863.39 v1(6476.38,863.39) v1@6480.31,863.39
JTAG_TDO: J2.9 U1.U13 | length 1298.6
  F.Cu w5: v1(5358.27,1107.48) 5359.45,1107.48 U1.U13@5371.26,1119.29
  In2.Cu w5: v1(5358.27,1107.48) 5368.77,1096.98 5370.14,1096.98 5387.2,1079.92 5538.7,1079.92 5570.53,1048.09 5605.97,1048.09 5630.57,1023.48 5666.28,1023.48 5681.22,1038.43 5733.43,1038.43 5770.67,1001.18 5871.72,1001.18 5912.12,1041.57 6185.49,1041.57 6314.96,912.11 6314.96,906.69 6405.02,816.63 v1(6469.49,816.63)
JTAG_TMS: J2.5 U1.T13 | length 1400.2
  F.Cu w5: v1(5401.57,1131.1) 5410.63,1122.05 U1.T13@5410.63,1119.29
  In2.Cu w5: v1(5401.57,1131.1) 5439.88,1092.8 5563.39,1092.8 5566.79,1096.2 5637.93,1096.2 5682.83,1051.3 5738.76,1051.3 5776.01,1014.06 5866.39,1014.06 5906.79,1054.45 6190.83,1054.45 6406.46,838.82 6478.68,838.82 6507.87,809.62 6507.87,755.02 v1(6469.49,716.63)
Net-(D1-A): D1.2 R18.1 | length 78.6
  F.Cu w5: D1.2@6136.32,1313.39 6185.43,1264.27 R18.1@6185.43,1255.12
Net-(D2-A): D2.2 R13.2 | length 76.5
  F.Cu w5: R13.2@4428.25,524.8 4428.25,528.35 D2.2@4479.82,579.92
Net-(D3-A): D3.2 R12.2 | length 61.6
  F.Cu w5: R12.2@6352.26,519.69 6352.26,568.5 D3.2@6361.32,577.56
Net-(D4-A): D4.2 R14.2 | length 63.6
  F.Cu w5: R14.2@6353.15,404.33 6353.15,452.46 D4.2@6364.07,463.39
Net-(D5-A): D5.2 R19.2 | length 61.9
  F.Cu w5: R19.2@6349.51,642.52 6349.51,687.89 D5.2@6361.22,699.61
Net-(J1-Pin_2): J1.2 R8.1 U1.U9 | length 722
  F.Cu w5: J1.2@5007.87,842.32 5007.87,909.25 R8.1@4975.98,941.14 5017.91,983.07 5018.11,983.07 5037.01,1001.97 5037.01,1131.1 5164.43,1258.52 5353.01,1258.52 U1.U9@5371.26,1276.77
Net-(U1B-IO_L13P_T2_MRCC_16): U1.C18 X1.3 | length 262.8
  F.Cu w5: U1.C18@5922.44,922.44 5942.13,942.13 6143.7,942.13 X1.3@6163.39,961.81 X1.3@6159.45,965.75
Net-(U1F-CFGBVS_0): R7.1 U1.U8 | length 27.9
  F.Cu w5: 5360.48,1323.43 5367.77,1316.14 U1.U8@5371.26,1316.14 5373.62,1316.14 v1(5381.89,1324.41)
Net-(U1F-DONE_0): R11.1 R18.2 U1.G11 | length 435.6
  F.Cu w5: U1.G11@5764.96,1198.03 5783.21,1216.28 6138.44,1216.28 R11.1@6144.88,1209.84 6145.28,1210.24 R18.2@6145.28,1255.12
Net-(U1F-INIT_B_0): R9.1 U1.U12 | length 22
  F.Cu w5: v1(5355.3,1144.15) 5369.81,1158.66 U1.U12@5371.26,1158.66
Net-(U1F-PROGRAM_B_0): R10.1 U1.N12 | length 102.2
  F.Cu w5: v1(5517.52,1147.44) U1.N12@5528.74,1158.66 5528.35,1158.66 5522.83,1164.17
  B.Cu w5: v1(5517.52,1147.44) 5530.12,1147.44 R10.1@5553.15,1170.47 5546.85,1164.17 5522.83,1164.17
Net-(U2-FB): C44.1 R1.2 R2.1 U2.5 | length 198.3
  F.Cu w5: R1.2@4718.07,1593.94 4679.09,1554.96 U2.5@4655.08,1554.96 4680.67,1554.96 R2.1@4718.07,1517.56 4718.86,1518.35 C44.1@4758.43,1518.35
Net-(U2-SW): L1.1 U2.3 | length 115.1
  F.Cu w5: L1.1@4452.81,1474.25 4559.61,1474.25 U2.3@4565.51,1480.16
Net-(U3-FB): C45.1 R3.1 R4.2 U3.5 | length 145.5
  F.Cu w5: U3.5@4659.7,932.52 4707.83,932.52 R3.1@4721.22,919.13 ; R4.2@4721.22,957.72 R3.1@4721.22,919.13 ; C45.1@4760.59,917.95 4722.4,917.95 R3.1@4721.22,919.13
Net-(U3-SW): L2.1 U3.3 | length 115.1
  F.Cu w5: L2.1@4457.44,851.81 4564.23,851.81 U3.3@4570.14,857.72
Net-(U4-FB): C46.1 R5.2 R6.1 U4.5 | length 146.5
  F.Cu w5: U4.5@4654.78,1242.56 4656.36,1244.13 R5.2@4716.3,1244.13 R6.1@4716.3,1205.55 4717.48,1204.37 C46.1@4761.57,1204.37
Net-(U4-SW): L3.1 U4.3 | length 115.1
  F.Cu w5: L3.1@4452.52,1161.85 4559.31,1161.85 U4.3@4565.22,1167.76
unconnected-(U1A-IO_0_14-PadP20): U1.P20
unconnected-(U1A-IO_25_14-PadN15): U1.N15
unconnected-(U1A-IO_L4N_T0_D05_14-PadU21): U1.U21
unconnected-(U1A-IO_L4P_T0_D04_14-PadT21): U1.T21
unconnected-(U1A-IO_L5N_T0_D07_14-PadR19): U1.R19
unconnected-(U1A-IO_L5P_T0_D06_14-PadP19): U1.P19
unconnected-(U1A-IO_L6N_T0_D08_VREF_14-PadT20): U1.T20
unconnected-(U1A-IO_L8N_T1_D12_14-PadAA21): U1.AA21
unconnected-(U1A-IO_L8P_T1_D11_14-PadAA20): U1.AA20
unconnected-(U1A-IO_L11N_T1_SRCC_14-PadV20): U1.V20
unconnected-(U1A-IO_L11P_T1_SRCC_14-PadU20): U1.U20
unconnected-(U1A-IO_L12N_T1_MRCC_14-PadW20): U1.W20
unconnected-(U1A-IO_L12P_T1_MRCC_14-PadW19): U1.W19
unconnected-(U1A-IO_L13N_T2_MRCC_14-PadY19): U1.Y19
unconnected-(U1A-IO_L13P_T2_MRCC_14-PadY18): U1.Y18
unconnected-(U1A-IO_L14N_T2_SRCC_14-PadV19): U1.V19
unconnected-(U1A-IO_L14P_T2_SRCC_14-PadV18): U1.V18
unconnected-(U1A-IO_L15N_T2_DQS_DOUT_CSO_B_14-PadAB20): U1.AB20
unconnected-(U1A-IO_L15P_T2_DQS_RDWR_B_14-PadAA19): U1.AA19
unconnected-(U1A-IO_L16N_T2_A15_D31_14-PadW17): U1.W17
unconnected-(U1A-IO_L16P_T2_CSI_B_14-PadV17): U1.V17
unconnected-(U1A-IO_L18N_T2_A11_D27_14-PadU18): U1.U18
unconnected-(U1A-IO_L18P_T2_A12_D28_14-PadU17): U1.U17
unconnected-(U1A-IO_L19N_T3_A09_D25_VREF_14-PadR14): U1.R14
unconnected-(U1A-IO_L19P_T3_A10_D26_14-PadP14): U1.P14
unconnected-(U1A-IO_L20N_T3_A07_D23_14-PadT18): U1.T18
unconnected-(U1A-IO_L20P_T3_A08_D24_14-PadR18): U1.R18
unconnected-(U1A-IO_L21N_T3_DQS_A06_D22_14-PadP17): U1.P17
unconnected-(U1A-IO_L21P_T3_DQS_14-PadN17): U1.N17
unconnected-(U1A-IO_L22N_T3_A04_D20_14-PadR16): U1.R16
unconnected-(U1A-IO_L22P_T3_A05_D21_14-PadP15): U1.P15
unconnected-(U1A-IO_L23N_T3_A02_D18_14-PadN14): U1.N14
unconnected-(U1A-IO_L23P_T3_A03_D19_14-PadN13): U1.N13
unconnected-(U1A-IO_L24N_T3_A00_D16_14-PadR17): U1.R17
unconnected-(U1A-IO_L24P_T3_A01_D17_14-PadP16): U1.P16
unconnected-(U1B-IO_0_15-PadJ16): U1.J16
unconnected-(U1B-IO_0_16-PadF15): U1.F15
unconnected-(U1B-IO_25_15-PadM17): U1.M17
unconnected-(U1B-IO_25_16-PadF21): U1.F21
unconnected-(U1B-IO_L1N_T0_16-PadF14): U1.F14
unconnected-(U1B-IO_L1N_T0_AD0N_15-PadG13): U1.G13
unconnected-(U1B-IO_L1P_T0_16-PadF13): U1.F13
unconnected-(U1B-IO_L1P_T0_AD0P_15-PadH13): U1.H13
unconnected-(U1B-IO_L2N_T0_16-PadE17): U1.E17
unconnected-(U1B-IO_L2N_T0_AD8N_15-PadG16): U1.G16
unconnected-(U1B-IO_L2P_T0_16-PadF16): U1.F16
unconnected-(U1B-IO_L2P_T0_AD8P_15-PadG15): U1.G15
unconnected-(U1B-IO_L3N_T0_DQS_16-PadC15): U1.C15
unconnected-(U1B-IO_L3N_T0_DQS_AD1N_15-PadH14): U1.H14
unconnected-(U1B-IO_L3P_T0_DQS_16-PadC14): U1.C14
unconnected-(U1B-IO_L3P_T0_DQS_AD1P_15-PadJ14): U1.J14
unconnected-(U1B-IO_L4N_T0_15-PadG18): U1.G18
unconnected-(U1B-IO_L4N_T0_16-PadE14): U1.E14
unconnected-(U1B-IO_L4P_T0_15-PadG17): U1.G17
unconnected-(U1B-IO_L4P_T0_16-PadE13): U1.E13
unconnected-(U1B-IO_L5N_T0_16-PadD16): U1.D16
unconnected-(U1B-IO_L5N_T0_AD9N_15-PadH15): U1.H15
unconnected-(U1B-IO_L5P_T0_16-PadE16): U1.E16
unconnected-(U1B-IO_L5P_T0_AD9P_15-PadJ15): U1.J15
unconnected-(U1B-IO_L6N_T0_VREF_15-PadH18): U1.H18
unconnected-(U1B-IO_L6N_T0_VREF_16-PadD15): U1.D15
unconnected-(U1B-IO_L6P_T0_15-PadH17): U1.H17
unconnected-(U1B-IO_L6P_T0_16-PadD14): U1.D14
unconnected-(U1B-IO_L7N_T1_16-PadB16): U1.B16
unconnected-(U1B-IO_L7P_T1_16-PadB15): U1.B15
unconnected-(U1B-IO_L8N_T1_AD10N_15-PadG20): U1.G20
unconnected-(U1B-IO_L8P_T1_AD10P_15-PadH20): U1.H20
unconnected-(U1B-IO_L10N_T1_AD11N_15-PadL21): U1.L21
unconnected-(U1B-IO_L10P_T1_AD11P_15-PadM21): U1.M21
unconnected-(U1B-IO_L11N_T1_SRCC_15-PadJ21): U1.J21
unconnected-(U1B-IO_L11N_T1_SRCC_16-PadB18): U1.B18
unconnected-(U1B-IO_L11P_T1_SRCC_15-PadJ20): U1.J20
unconnected-(U1B-IO_L11P_T1_SRCC_16-PadB17): U1.B17
unconnected-(U1B-IO_L12N_T1_MRCC_16-PadC17): U1.C17
unconnected-(U1B-IO_L12P_T1_MRCC_16-PadD17): U1.D17
unconnected-(U1B-IO_L13N_T2_MRCC_16-PadC19): U1.C19
unconnected-(U1B-IO_L14N_T2_SRCC_15-PadL20): U1.L20
unconnected-(U1B-IO_L14P_T2_SRCC_15-PadL19): U1.L19
unconnected-(U1B-IO_L16N_T2_A27_15-PadL18): U1.L18
unconnected-(U1B-IO_L16P_T2_A28_15-PadM18): U1.M18
unconnected-(U1B-IO_L17N_T2_A25_15-PadN19): U1.N19
unconnected-(U1B-IO_L17P_T2_A26_15-PadN18): U1.N18
unconnected-(U1B-IO_L18N_T2_16-PadF20): U1.F20
unconnected-(U1B-IO_L18N_T2_A23_15-PadM20): U1.M20
unconnected-(U1B-IO_L18P_T2_16-PadF19): U1.F19
unconnected-(U1B-IO_L18P_T2_A24_15-PadN20): U1.N20
unconnected-(U1B-IO_L19N_T3_A21_VREF_15-PadK14): U1.K14
unconnected-(U1B-IO_L19P_T3_16-PadD20): U1.D20
unconnected-(U1B-IO_L19P_T3_A22_15-PadK13): U1.K13
unconnected-(U1B-IO_L20N_T3_A19_15-PadL13): U1.L13
unconnected-(U1B-IO_L20P_T3_A20_15-PadM13): U1.M13
unconnected-(U1B-IO_L21N_T3_DQS_A18_15-PadJ17): U1.J17
unconnected-(U1B-IO_L21P_T3_DQS_15-PadK17): U1.K17
unconnected-(U1B-IO_L22N_T3_A16_15-PadL15): U1.L15
unconnected-(U1B-IO_L22P_T3_A17_15-PadL14): U1.L14
unconnected-(U1B-IO_L23N_T3_FWE_B_15-PadK16): U1.K16
unconnected-(U1B-IO_L23P_T3_FOE_B_15-PadL16): U1.L16
unconnected-(U1B-IO_L24N_T3_RS0_15-PadM16): U1.M16
unconnected-(U1B-IO_L24P_T3_RS1_15-PadM15): U1.M15
unconnected-(U1C-IO_0_34-PadT3): U1.T3
unconnected-(U1C-IO_0_35-PadF4): U1.F4
unconnected-(U1C-IO_25_34-PadU7): U1.U7
unconnected-(U1C-IO_25_35-PadL6): U1.L6
unconnected-(U1C-IO_L2N_T0_34-PadV2): U1.V2
unconnected-(U1C-IO_L2P_T0_34-PadU2): U1.U2
unconnected-(U1C-IO_L3N_T0_DQS_34-PadR2): U1.R2
unconnected-(U1C-IO_L3P_T0_DQS_34-PadR3): U1.R3
unconnected-(U1C-IO_L4N_T0_34-PadY2): U1.Y2
unconnected-(U1C-IO_L4N_T0_35-PadD2): U1.D2
unconnected-(U1C-IO_L4P_T0_34-PadW2): U1.W2
unconnected-(U1C-IO_L4P_T0_35-PadE2): U1.E2
unconnected-(U1C-IO_L6N_T0_VREF_34-PadV3): U1.V3
unconnected-(U1C-IO_L6P_T0_34-PadU3): U1.U3
unconnected-(U1C-IO_L9N_T1_DQS_34-PadAA3): U1.AA3
unconnected-(U1C-IO_L9N_T1_DQS_AD7N_35-PadJ2): U1.J2
unconnected-(U1C-IO_L9P_T1_DQS_34-PadY3): U1.Y3
unconnected-(U1C-IO_L9P_T1_DQS_AD7P_35-PadK2): U1.K2
unconnected-(U1C-IO_L10N_T1_AD15N_35-PadH5): U1.H5
unconnected-(U1C-IO_L10P_T1_AD15P_35-PadJ5): U1.J5
unconnected-(U1C-IO_L11N_T1_SRCC_34-PadAA4): U1.AA4
unconnected-(U1C-IO_L11N_T1_SRCC_35-PadG3): U1.G3
unconnected-(U1C-IO_L11P_T1_SRCC_34-PadY4): U1.Y4
unconnected-(U1C-IO_L11P_T1_SRCC_35-PadH3): U1.H3
unconnected-(U1C-IO_L12N_T1_MRCC_34-PadW4): U1.W4
unconnected-(U1C-IO_L12P_T1_MRCC_34-PadV4): U1.V4
unconnected-(U1C-IO_L13N_T2_MRCC_34-PadT4): U1.T4
unconnected-(U1C-IO_L13N_T2_MRCC_35-PadJ4): U1.J4
unconnected-(U1C-IO_L13P_T2_MRCC_34-PadR4): U1.R4
unconnected-(U1C-IO_L13P_T2_MRCC_35-PadK4): U1.K4
unconnected-(U1C-IO_L14N_T2_SRCC_34-PadU5): U1.U5
unconnected-(U1C-IO_L14N_T2_SRCC_35-PadK3): U1.K3
unconnected-(U1C-IO_L14P_T2_SRCC_34-PadT5): U1.T5
unconnected-(U1C-IO_L14P_T2_SRCC_35-PadL3): U1.L3
unconnected-(U1C-IO_L15N_T2_DQS_34-PadW5): U1.W5
unconnected-(U1C-IO_L15P_T2_DQS_34-PadW6): U1.W6
unconnected-(U1C-IO_L16N_T2_34-PadV5): U1.V5
unconnected-(U1C-IO_L16N_T2_35-PadM2): U1.M2
unconnected-(U1C-IO_L16P_T2_34-PadU6): U1.U6
unconnected-(U1C-IO_L16P_T2_35-PadM3): U1.M3
unconnected-(U1C-IO_L17N_T2_34-PadT6): U1.T6
unconnected-(U1C-IO_L17N_T2_35-PadJ6): U1.J6
unconnected-(U1C-IO_L17P_T2_34-PadR6): U1.R6
unconnected-(U1C-IO_L17P_T2_35-PadK6): U1.K6
unconnected-(U1C-IO_L18N_T2_34-PadAA6): U1.AA6
unconnected-(U1C-IO_L18N_T2_35-PadL4): U1.L4
unconnected-(U1C-IO_L18P_T2_34-PadY6): U1.Y6
unconnected-(U1C-IO_L18P_T2_35-PadL5): U1.L5
unconnected-(U1C-IO_L19N_T3_VREF_34-PadW7): U1.W7
unconnected-(U1C-IO_L19N_T3_VREF_35-PadN3): U1.N3
unconnected-(U1C-IO_L19P_T3_34-PadV7): U1.V7
unconnected-(U1C-IO_L19P_T3_35-PadN4): U1.N4
unconnected-(U1C-IO_L21N_T3_DQS_34-PadV8): U1.V8
unconnected-(U1C-IO_L21N_T3_DQS_35-PadP4): U1.P4
unconnected-(U1C-IO_L21P_T3_DQS_34-PadV9): U1.V9
unconnected-(U1C-IO_L21P_T3_DQS_35-PadP5): U1.P5
unconnected-(U1C-IO_L22N_T3_34-PadAB8): U1.AB8
unconnected-(U1C-IO_L22P_T3_34-PadAA8): U1.AA8
unconnected-(U1C-IO_L23N_T3_34-PadY7): U1.Y7
unconnected-(U1C-IO_L23N_T3_35-PadM5): U1.M5
unconnected-(U1C-IO_L23P_T3_34-PadY8): U1.Y8
unconnected-(U1C-IO_L23P_T3_35-PadM6): U1.M6
unconnected-(U1C-IO_L24N_T3_34-PadY9): U1.Y9
unconnected-(U1C-IO_L24N_T3_35-PadN5): U1.N5
unconnected-(U1C-IO_L24P_T3_34-PadW9): U1.W9
unconnected-(U1C-IO_L24P_T3_35-PadP6): U1.P6
unconnected-(U1D-MGTPTXN0_216-PadA4): U1.A4
unconnected-(U1D-MGTPTXN1_216-PadC5): U1.C5
unconnected-(U1D-MGTPTXN2_216-PadA6): U1.A6
unconnected-(U1D-MGTPTXN3_216-PadC7): U1.C7
unconnected-(U1D-MGTPTXP0_216-PadB4): U1.B4
unconnected-(U1D-MGTPTXP1_216-PadD5): U1.D5
unconnected-(U1D-MGTPTXP2_216-PadB6): U1.B6
unconnected-(U1D-MGTPTXP3_216-PadD7): U1.D7
unconnected-(U1D-MGTREFCLK0N_216-PadE6): U1.E6
unconnected-(U1D-MGTREFCLK0P_216-PadF6): U1.F6
unconnected-(U1D-MGTREFCLK1N_216-PadE10): U1.E10
unconnected-(U1D-MGTREFCLK1P_216-PadF10): U1.F10
unconnected-(U1E-MGTRREF_216-PadF8): U1.F8
USER_LED0: R19.1 U1.C20 | length 469
  F.Cu w7.87: U1.C20@5922.44,843.7 5922.44,843.31 v1(5938.98,826.77)
  B.Cu w7.87: v1(5938.98,826.77) 6123.23,642.52 v1(6307.87,642.52)
USER_LED1: R12.1 U1.H22 | length 739.2
  F.Cu w5: v1(5724.15,746.85) 5725.59,748.29 U1.H22@5725.59,764.96
  In1.Cu w5: v1(5724.15,746.85) 5724.15,678.33 5793.96,608.52 5822.58,608.52 5911.81,519.29 v1(6310.24,519.29)
USER_LED2: R14.1 U1.J22 | length 849.3
  F.Cu w5: v1(5686.22,746.46) U1.J22@5686.22,764.96
  In1.Cu w5: v1(5686.22,746.46) 5686.22,698.06 5788.63,595.65 5816.95,595.65 5907.48,505.12 6274.02,505.12 6313.39,465.75 v1(6313.39,406.69)
pads on no net: J2.Un1 J2.Un2 J3.Un1 J3.Un2 J4.Un1 J4.Un2 U1.AA9 U1.AA10 U1.AA11 U1.AA13 U1.AA14 U1.AA15 U1.AA16 U1.AB10 U1.AB11 U1.AB12 U1.AB13 U1.AB15 U1.AB16 U1.AB17 U1.T14 U1.T15 U1.T16 U1.U15 U1.U16 U1.V10 U1.V13 U1.V14 U1.V15 U1.W10 U1.W11 U1.W12 U1.W14 U1.W15 U1.W16 U1.Y11 U1.Y12 U1.Y13 U1.Y14 U1.Y16 U1.Y17 U5.9 U5.Un1 U5.Un2 U5.Un3 U5.Un4

## Polygon pours and split planes (outlines as drawn)
GND on F.Cu "F.Cu-GND" (solid, remove dead copper, pour order 23): 4330.71,2068.11 6692.91,2068.11 6692.91,99.61 4330.71,99.61
+1V0 on F.Cu "F.Cu-+1V0" (solid, remove dead copper, pour order 18): 4909.45,1351.57 4937.01,1324.02 4937.01,1304.33 4913.39,1280.71 4783.46,1280.71 4767.72,1296.46 4767.72,1335.83 4783.46,1351.57
+3V3 on F.Cu "F.Cu-+3V3" (solid, remove dead copper, pour order 21): 4814.96,1662.6 4992.13,1662.6 5122.05,1532.68 5122.05,1367.32 5114.17,1359.45 5047.24,1359.45 5043.31,1359.45 5031.5,1367.32 5031.5,1552.36 5000,1583.86 4818.9,1583.86 4799.21,1603.54 4799.21,1646.85
+1V8 on F.Cu "F.Cu-+1V8" (solid, remove dead copper, pour order 17): 4790,1020.32 4980,1020.32 4990,1010.32 4990,989.37 4922.41,990.13 4853.94,956.07 4780,957.87 4780,1010.32
+1V0 on In1.Cu "In1.Cu-+1V0" (solid, remove dead copper, pour order 15): 5400,1350.32 5450,1400.32 5590,1400.32 5610,1380.32 5690,1380.32 5740,1330.32 5740,1220.32 5710,1190.32 5680,1190.32 5670,1200.32 5670,1250.32 5660,1260.32 5630,1260.32 5620,1250.32 5620,1200.32 5600,1180.32 5510,1180.32 5469.84,1220.47 5420.16,1220.47 5420,1220.32 5400,1220.32 5390,1230.32 5390,1260.32 5370,1280.32 4920,1280.32 4890,1280.32 4790,1280.32 4770,1300.32 4770,1340.32 4780,1350.32
+5V on In1.Cu "In1.Cu-+5V" (solid, remove dead copper, pour order 13): 4330.71,2068.11 5039.37,2068.11 5039.37,99.61 4330.71,99.61
+3V3 on In1.Cu "In1.Cu-+3V3-1" (solid, remove dead copper, pour order 12): 4330.71,2068.11 6692.91,2068.11 6692.91,99.61 4330.71,99.61
+1V8 on In1.Cu "In1.Cu-+1V8" (solid, remove dead copper, pour order 19): 5173.23,1040.55 5196.85,1016.93 5271.65,1016.93 5269.29,1014.57 5269.29,1159.45 5327.56,1217.72 5468.5,1217.72 5507.87,1178.35 5507.87,1174.41 5602.36,1174.41 5622.05,1194.09 5622.05,1261.02 5629.92,1268.9 5645.67,1268.9 5669.29,1245.28 5669.29,1229.53 5649.61,1209.84 5649.61,1194.09 5657.48,1186.22 5846.46,1186.22 5858.27,1174.41 5858.27,1146.85 5850.39,1138.98 5484.25,1138.98 5443.31,1179.92 5366.14,1179.92 5366.14,1064.17 5299.21,997.24 4997.87,997.24 4990,989.37 4803.15,989.37 4783.46,1009.06 4783.46,1028.74 4795.28,1040.55
+3V3 on In1.Cu "In1.Cu-+3V3" (solid, remove dead copper, pour order 14): 5039.37,2068.11 6692.91,2068.11 6692.91,99.61 5039.37,99.61
GND on In2.Cu "In2.Cu-GND" (solid, remove dead copper, pour order 22): 4331.1,2069.29 6698.03,2069.29 6699.61,2067.72 6699.61,95.67 4337.01,95.67 4331.1,101.57
GND on B.Cu "B.Cu-GND" (solid, remove dead copper, pour order 16): 4330.71,2068.5 6692.52,2068.5 6693.31,2067.72 6693.31,98.82 4331.1,98.82 4330.71,99.21
+3V3 on B.Cu "B.Cu-+3V3" (solid, remove dead copper, pour order 20): 5039.37,1402.76 5122.05,1402.76 5129.92,1394.88 5129.92,1261.02 5122.05,1253.15 5047.24,1253.15 5031.5,1268.9 5031.5,1394.88

## Keep-outs
Edge.Cuts:
  lines w0: 4336.22,253.54 ccw(c4493.7,253.54) 4493.7,96.06 6540.94,96.06 ccw(c6540.94,253.54) 6698.43,253.54 6698.43,1907.09 ccw(c6540.94,1907.09) 6540.94,2064.57 4493.7,2064.57 ccw(c4493.7,1907.09) 4336.22,1907.09 4336.22,253.54
  lines w10: 4336.22,253.54 ccw(c4493.7,253.54) 4493.7,96.06 6540.94,96.06 ccw(c6540.94,253.54) 6698.43,253.54 6698.43,1907.09 ccw(c6540.94,1907.09) 6540.94,2064.57 4493.7,2064.57 ccw(c4493.7,1907.09) 4336.22,1907.09 4336.22,253.54

## Silkscreen, mask and mechanical layers (free items; w line width, h text height)
F.SilkS:
  text "Rev. A1" at 4677.56,1967.38 h27.56
  text "DONE" at 6098.43,1346.56 h31.5
  text "LED0" at 6144.78,669.39 h31.5
  text "VCC" at 4398.03,608.77 h31.5
  text "LED1" at 6140.85,549.16 h31.5
  text "LED2" at 6144.78,434.9 h31.5
  text "CP SOM ONE" at 5884.65,113.48 h59.06
B.SilkS:
  text "Designed in Valencia" at 4446.16,1650.39 h39.37 r90
  text "devices. / controlpaths. / com" at 4881.6,859.45 h59.06 r90

## Dimensions
5528.64,1891.54 to 6698.43,1891.54 on Eco1.User
4533.07,292.91 to 4336.22,292.91 on Eco1.User
4533.07,292.91 to 4533.07,96.06 on Eco1.User
4330.71,2068.11 to 6692.91,2068.11 on Eco1.User
4330.71,2068.11 to 4330.71,99.61 on Eco1.User
5528.64,260.43 to 6698.43,260.43 on Eco1.User
5528.64,257.48 to 5528.64,96.06 on Eco1.User
5528.64,1903.15 to 5528.64,2064.57 on Eco1.User